# Altium PCB ArduinoUnoShield.PcbDoc
Units mil, origin at the board's own origin, x right, y up, seen from the top; angles counter-clockwise.
Board outline 2700 x 2100 mil, 2 copper layers (Top Layer, Bottom Layer); 41 components, 79 nets, 282 pads, 39 vias.
Unrouted connection lines stored in the file: 2.
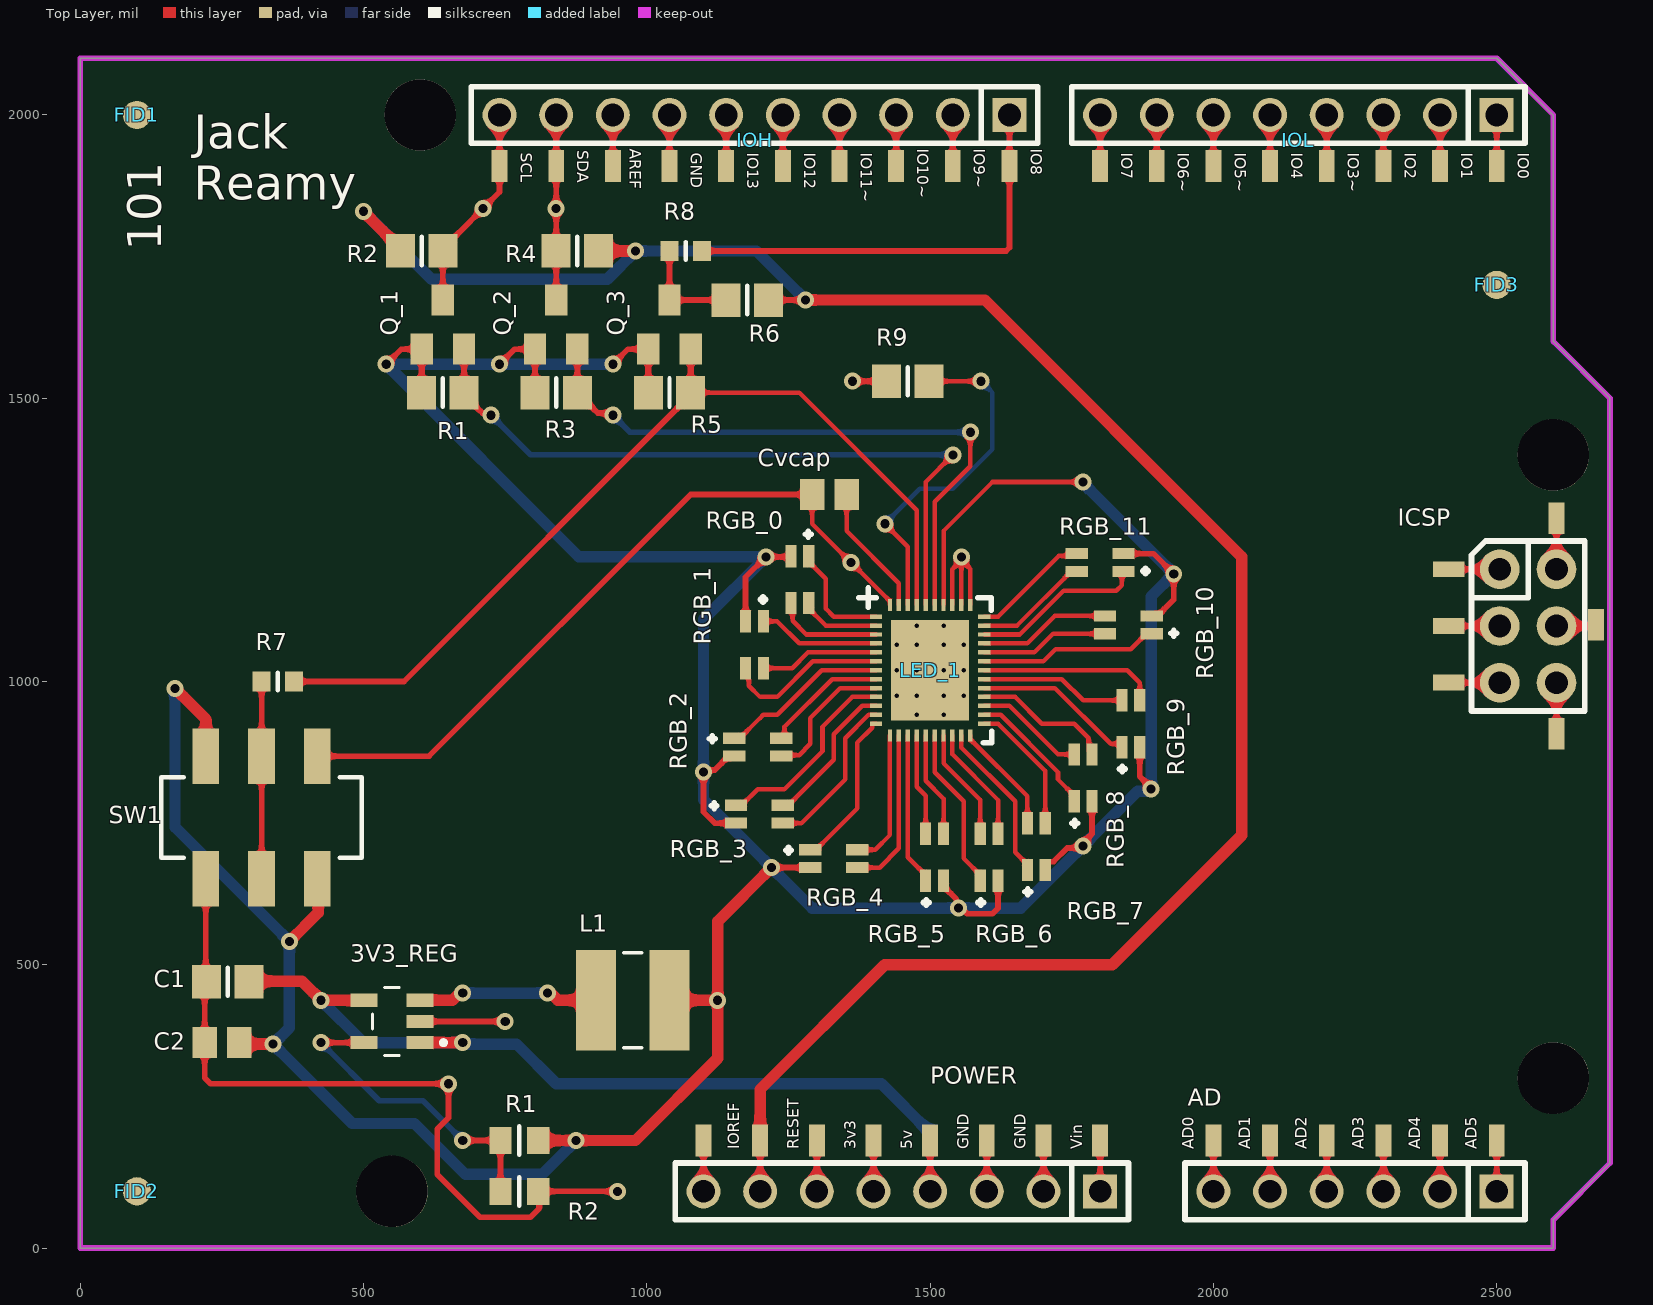
[diagram p0: Top Layer view]
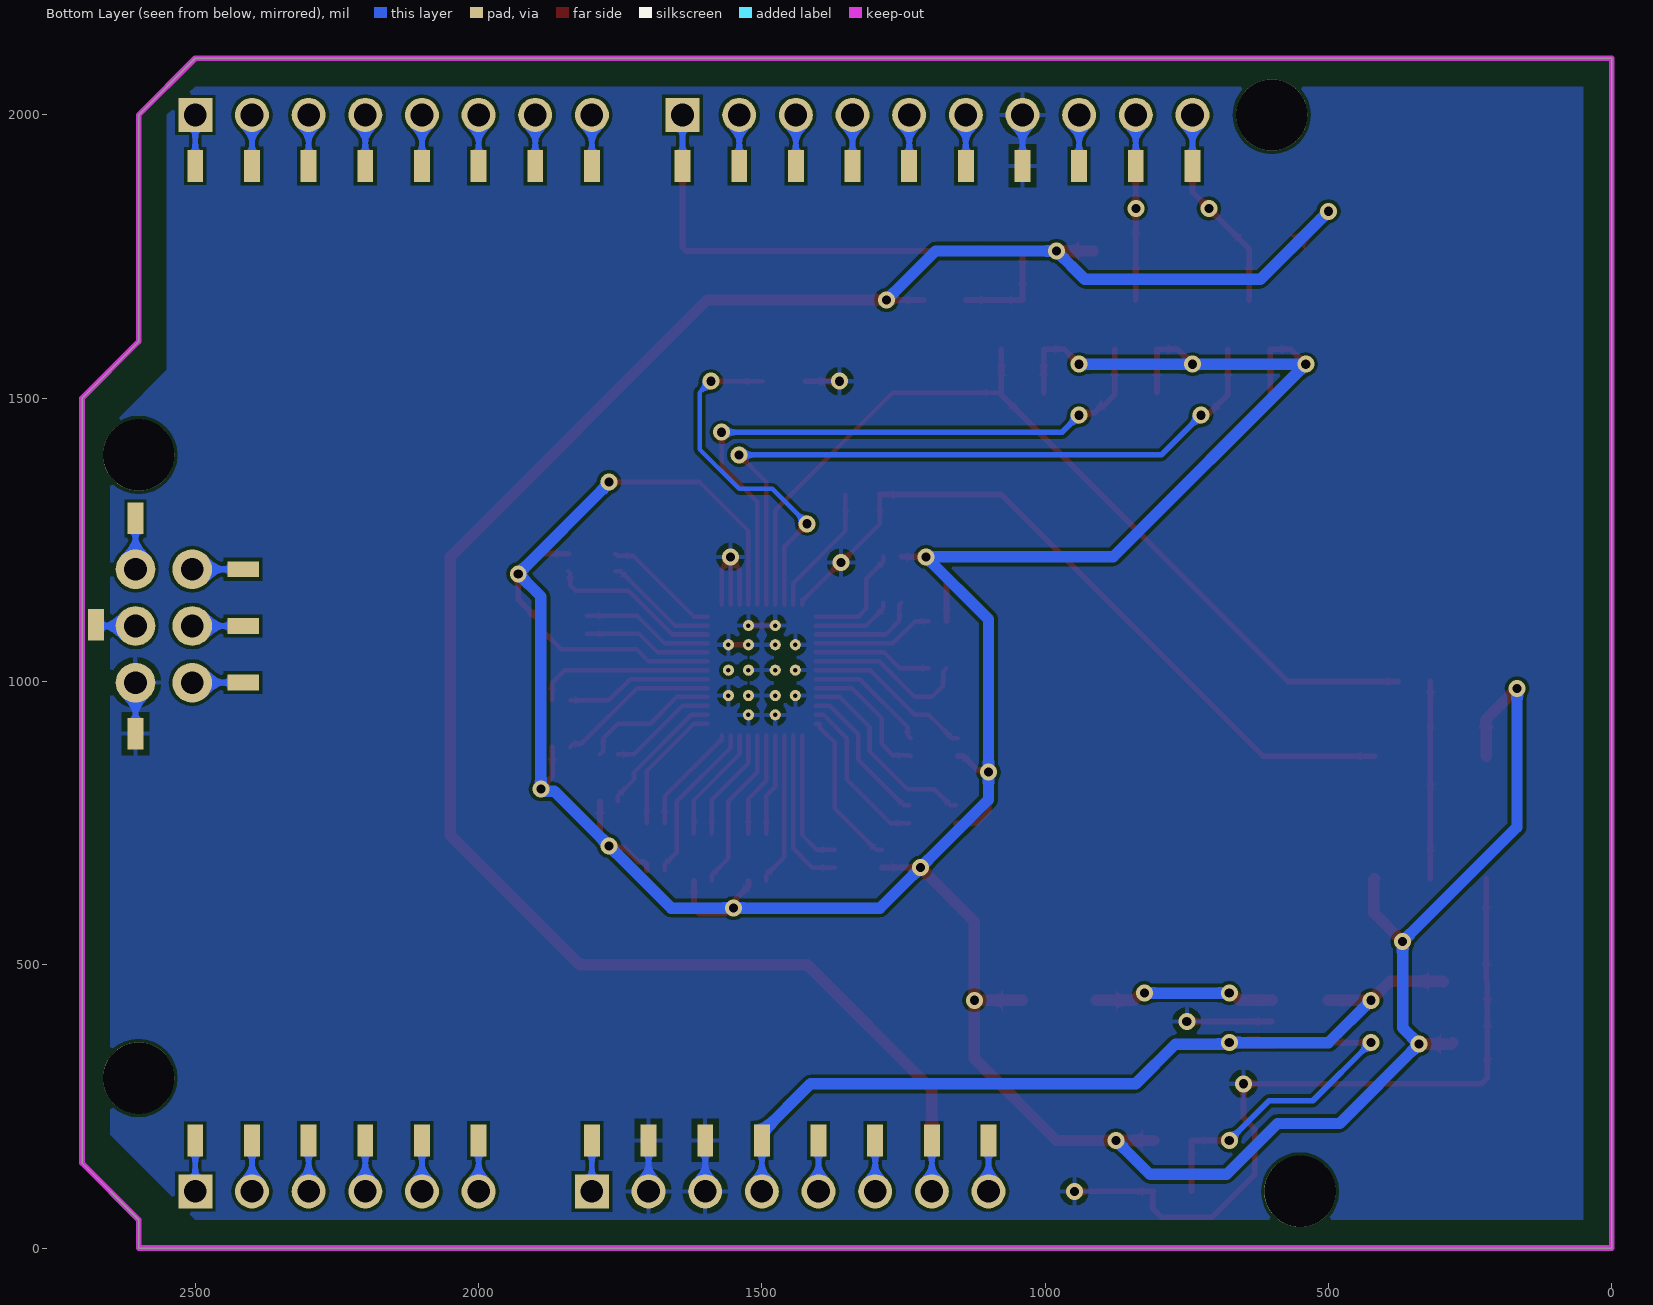
[diagram p1: Bottom Layer view, seen from below]

## Layer stack, top to bottom
Top Solder: solder mask 0.4, Solder Resist, Dk 3.5
Top Layer: signal copper 1.4
Dielectric1: dielectric 12.6, FR-4, Dk 4.8
Bottom Layer: signal copper 1.4
Bottom Solder: solder mask 0.4, Solder Resist, Dk 3.5

## Board outline
0,0 0,2100 2500,2100 2600,2000 2600,1600 2700,1500 2700,150 2600,50 2600,0

## Design rules (kind name [scope] priority, off if disabled: settings)
Clearance "Clearance~Sunstone Circuits" [All] p1: gap=6 ignorepadtopadclearanceinfootprint=FALSE except(0: Arc-Hole Track-Hole SMDPad-Hole THPad-Hole Via-Hole Fill-Hole Poly-Hole Region-Hole Text-Hole) // Sunstone Circuits Minimum Clearance Rule (Double Sided)
HoleSize "HoleSize~Sunstone Circuits" [All] p1: absolutevalues=TRUE maxlimit=251 minlimit=8 maxpercent=80.000 minpercent=20.000 // SSC Hole Size Rule For Single Sided & Double Sided Designs.
HoleSize Testpoint [All] p2: absolutevalues=TRUE maxlimit=100 minlimit=1 maxpercent=80.000 minpercent=20.000
HoleSize TestPointUsage [All] p3: absolutevalues=TRUE maxlimit=100 minlimit=1 maxpercent=80.000 minpercent=20.000
MinimumAnnularRing "MinimumAnnularRing~Sunstone Circuits" [All] p1: minimumring=7 // Sunstone Circuits Minimum Annular Ring (Double Sided)
MinimumSolderMaskSliver [All] p1: minsoldermaskwidth=1
PlaneClearance "PlaneClearance~Sunstone Circuits" [All] p1: clearance=12 // Sunstone Circuits Power Plane Clearance Rule (Double Sided)
PlaneConnect "PlaneConnect~Sunstone Circuits" [All] p1: planeconnectstyle=Relief reliefexpansion=10 reliefentries=4 reliefconductorwidth=8 reliefairgap=10 // Sunstone Circuits Power Plane Connect Rule (Double Sided)
PolygonConnect "PolygonConnect~Sunstone Circuits" [All] p1: connectstyle=Relief reliefconductorwidth=8 reliefentries=4 polygonreliefangle="90 Angle" airgapwidth=10 // Sunstone Circuits Polygon Connect Style (Double Sided)
RoutingVias "RoutingVias~Sunstone Circuits" [All] p1: holewidth=16 width=30 viastyle="Through Hole" minholewidth=16 minwidth=30 maxholewidth=20 maxwidth=40 // Sunstone Circuits Routing Vias Rule (Double Sided)
ShortCircuit "ShortCircuit~Sunstone Circuits" [All] p1: allowed=FALSE // Sunstone Circuits Short Circuit Rule~Do Not Allow (Double Sided)
SilkToSilkClearance [All] p1: silktosilkclearance=1
SilkToSolderMaskClearance [IsPad] p1: minsilkscreentomaskgap=5 clearancetoexposedcopper=TRUE
SolderMaskExpansion "SolderMaskExpansion~Sunstone Circuits" [All] p1: expansion=3 // Sunstone Circuits Solder Mask Expansion Rule (Double Sided)
ViasUnderSMD "ViasUnderSMD~Sunstone Circuits" [All] p1: allowed=FALSE // Sunstone Circuits Vias Under SMD~Do Not Allow (Double Sided)
Width "Width~Sunstone Circuits" [All] p1: maxlimit=100 minlimit=6 preferedwidth=10 // Sunstone Circuits Minimum Width Rule (Double Sided)
23 further rules are at their usual default settings.

## Classes and differential pairs
component class ArduinoUnoShield: 3V3_REG AD C1 C2 Cvcap FID1 FID2 FID3 ICSP L1 LED_1 POWER Q_1 Q_2 Q_3 R1 R2 R3 R4 R5 R6 R7 R8 R9 RGB_0 RGB_1 RGB_2 RGB_3 RGB_4 RGB_5 RGB_6 RGB_7 RGB_8 RGB_9 RGB_10 RGB_11 SW1

## Components (designator, comment, footprint, x,y, rotation, side; value= is the part's Value field where it differs from the comment)
3V3_REG "TLV62568DBVR" *SOT95P280X145-5N 550,400 r90 top
AD "AD" "Header 6x1 8.5mm" 2500,100 r180 top
C1 "4.7uF, 10%" 0805 260,470 r0 top
C2 "1uF, 5%" 0805_CAP_HD 250,362.6 r0 top
Cvcap "22uF, 20%" 0805_CAP_HD 1322.09,1330 r180 top
FID1 "FIDUCIAL" "FIDUCIAL (50MIL ROUND)" 100,2000 r90 top
FID2 "FIDUCIAL" "FIDUCIAL (50MIL ROUND)" 100,100 r90 top
FID3 "FIDUCIAL" "FIDUCIAL (50MIL ROUND)" 2500,1700 r90 top
ICSP "ICSP" ICSP 2505.51,1198.03 r0 top
IOH "IOH" "Header 10x1 8.5mm" 1640,2000 r180 top
IOL "IOL" "Header 8x1 8.5mm" 2500,2000 r180 top
L1 "SDR0403-2R2ML" *SDR0403 975,437.4 r0 top
LED_1 "LP5036RJVR" RJV0046A 1500,1020 r0 top
POWER "POWER_UNO" "Header 8x1 8.5mm v2" 1800,100 r180 top
Q_1 "BSS138" *BSS138_BSS138(Primary) 640,1630 r0 top
Q_2 "BSS138" *BSS138_BSS138(Primary) 840,1630 r0 top
Q_3 "BSS138" *BSS138_BSS138(Primary) 1040,1630 r0 top
R1 "4.7K, 5%" 0805 640,1510 r180 top
R1 "R-NP" 0805_RES_HD 775,190 r0 top (schematic designator "R1 (Rfdt)")
R2 "4.7K, 5%" 0805 602.6,1760 r180 top
R2 "R-NP" 0805_RES_HD 775,100 r0 top (schematic designator "R2 (Rfbb)")
R3 "4.7K, 5%" 0805 840,1510 r180 top
R4 "4.7K, 5%" 0805 877.4,1760 r0 top
R5 "4.7K, 5%" 0805 1040,1510 r180 top
R6 "4.7K, 5%" 0805 1177.4,1673.31 r0 top
R7 "0, 5%" 0603_RES_HD 348.54,1000 r0 top
R8 "0, 5%" 0603_RES_HD 1068.54,1760 r180 top
R9 "4.7K, 5%" 0805 1460.63,1530 r0 top
RGB_0 "RGB LED" PCBComponent_1 1270,1180 r270 top
RGB_1 "RGB LED" PCBComponent_1 1190,1064.88 r270 top
RGB_2 "RGB LED" PCBComponent_1 1195.67,884.17 r0 top
RGB_3 "RGB LED" PCBComponent_1 1198.66,765.75 r0 top
RGB_4 "RGB LED" PCBComponent_1 1330,687.32 r0 top
RGB_5 "RGB LED" PCBComponent_1 1507.87,689.82 r90 top
RGB_6 "RGB LED" PCBComponent_1 1604.15,689.82 r90 top
RGB_7 "RGB LED" PCBComponent_1 1687.5,708.66 r90 top
RGB_8 "RGB LED" PCBComponent_1 1770,830 r90 top
RGB_9 "RGB LED" PCBComponent_1 1854.32,925.51 r90 top
RGB_10 "RGB LED" PCBComponent_1 1850,1100 r180 top
RGB_11 "RGB LED" PCBComponent_1 1800,1210 r180 top
SW1 "JS202011SCQN" JS202011SCQN 320,760 r0 top

## Footprints (in the part's own frame and the unit in brackets; to place one, negate y for a bottom-side part, rotate by r counter-clockwise, add the part's x,y. Pads: shape width x height; smd on the part's side, far side on the other; paste and mask are expansions set on the pad)
0603_RES_HD [mm] "Chip Resistor, 2-Leads, Body 1.60x0.85mm, IPC High Density"
  rect 0.8x0.9 smd: 1(-0.725,0) 2(0.725,0)
  silkscreen extent 0,-0.4 0,0.4, body extent -0.87,-0.48 0.87,0.48, height 0.55
0805 [mm] "Chip Capacitor; Body 2.0 x 1.2 mm (LxW typ)"
  rect 1.3x1.5 smd: 1(-0.95,0) 2(0.95,0)
  silkscreen extent 0,-0.64 0,0.64, body extent -1,-0.6 1,0.6, height 1.5
0805_CAP_HD [mm] "Chip Capacitor, 2-Leads, Body 2.00x1.25mm, IPC High Density"
  rect 1.1x1.4 smd: 1(-0.775,0) 2(0.775,0)
  body extent -1.1,-0.72 1.1,0.73, height 1.4
0805_RES_HD [mm] "Chip Resistor, 2-Leads, Body 2.00x1.25mm, IPC High Density"
  rect 1x1.2 smd: 1(-0.85,0) 2(0.85,0)
  silkscreen extent 0,-0.64 0,0.64, body extent -1.1,-0.68 1.1,0.67, height 0.65
*BSS138_BSS138(Primary) [mm]
  rect 1x1.4 smd: D(0,1.1) G(-0.95,-1.1) S(0.95,-1.1)
*SDR0403 [mil]
  rect 71x177 smd: 1(-65,0) 2(65,0)
  silkscreen extent -16,-84 16,84
*SOT95P280X145-5N [mm]
  rect 0.59x1.21 smd: 1(-0.95,-1.255) 2(0,-1.255) 3(0.95,-1.255) 4(0.95,1.255) 5(-0.95,1.255)
  silkscreen extent -1.53,-2.41 1.53,0.87
"FIDUCIAL (50MIL ROUND)" [mil]
  round 50 smd paste-50 mask+25: FIDDLEYDOODLEYDOO(0,0)
"Header 6x1 8.5mm" [mil] "Stackable 6 pin header"
  rect 60x60 hole 40: 1(0,0)
  rect 28x56 smd: 1(0,-90) 2(100,-90) 3(200,-90) 4(300,-90) 5(400,-90) 6(500,-90)
  rect 28x56 smd far side: 1(0,-90) 2(100,-90) 3(200,-90) 4(300,-90) 5(400,-90) 6(500,-90)
  round 60 hole 40: 2(100,0) 3(200,0) 4(300,0) 5(400,0) 6(500,0)
  silkscreen extent -50,-50 550,50, body extent -50,-50 550,50, height 335
"Header 8x1 8.5mm" [mil] "Stackable 8 pin header"
  rect 28x56 smd: 1(0,90) 2(100,90) 3(200,90) 4(300,90) 5(400,90) 6(500,90) 7(600,90) 8(700,90)
  rect 28x56 smd far side: 1(0,90) 2(100,90) 3(200,90) 4(300,90) 5(400,90) 6(500,90) 7(600,90) 8(700,90)
  rect 60x60 hole 40: 1(0,0)
  round 60 hole 40: 2(100,0) 3(200,0) 4(300,0) 5(400,0) 6(500,0) 7(600,0) 8(700,0)
  silkscreen extent -50,-50 750,50, body extent -50,-50 750,50, height 335
"Header 8x1 8.5mm v2" [mil] "Stackable 8 pin header"
  rect 60x60 hole 40: 1(0,0)
  rect 28x56 smd: 1(0,-90) 2(100,-90) 3(200,-90) 4(300,-90) 5(400,-90) 6(500,-90) 7(600,-90) 8(700,-90)
  rect 28x56 smd far side: 1(0,-90) 2(100,-90) 3(200,-90) 4(300,-90) 5(400,-90) 6(500,-90) 7(600,-90) 8(700,-90)
  round 60 hole 40: 2(100,0) 3(200,0) 4(300,0) 5(400,0) 6(500,0) 7(600,0) 8(700,0)
  silkscreen extent -50,-50 750,50, body extent -50,-50 750,50, height 335
"Header 10x1 8.5mm" [mil] "Stackable 10 pin header"
  rect 28x56 smd: 1(0,90) 2(100,90) 3(200,90) 4(300,90) 5(400,90) 6(500,90) 7(600,90) 8(700,90) 9(800,90) 10(900,90)
  rect 28x56 smd far side: 1(0,90) 2(100,90) 3(200,90) 4(300,90) 5(400,90) 6(500,90) 7(600,90) 8(700,90) 9(800,90) 10(900,90)
  rect 60x60 hole 40: 1(0,0)
  round 60 hole 40: 2(100,0) 3(200,0) 4(300,0) 5(400,0) 6(500,0) 7(600,0) 8(700,0) 9(800,0) 10(900,0)
  silkscreen extent -50,-50 950,50, body extent -50,-50 950,50, height 335
ICSP [mil]
  rect 56x28 smd: 1(-90,0) 3(-90,-100) 5(-90,-200)
  rect 56x28 smd far side: 1(-90,0) 3(-90,-100) 5(-90,-200)
  round 70 hole 40: 1(0,0) 2(100,0) 3(0,-100) 4(100,-100) 5(0,-200) 6(100,-200)
  rect 28x56 smd: 2(100,90) 4(169.49,-98.03) 6(100,-290)
  rect 28x56 smd far side: 2(100,90) 4(169.49,-98.03) 6(100,-290)
  silkscreen extent -50,-250 150,50, body extent -50,-250 150,50, height 485
JS202011SCQN [mm]
  rect 1.2x2.5 smd: 1(-2.5,-2.75) 2(0,-2.75) 3(2.5,-2.75) 4(2.5,2.75) 5(0,2.75) 6(-2.5,2.75)
  silkscreen extent -4.5,-1.8 4.5,1.8, body extent -4.5,-1.8 4.5,1.8, height 5.5
PCBComponent_1 [mm]
  rect 1x0.5 smd: 1(-1.05,0.4) 2(1.05,0.4) 3(-1.05,-0.4) 4(1.05,-0.4)
  silkscreen extent -2.16,0.25 -1.91,0.51
RJV0046A [mm]
  rect 0.55x0.2 smd: 1(-2.425,2.4) 2(-2.425,2) 3(-2.425,1.6) 4(-2.425,1.2) 5(-2.425,0.8) 6(-2.425,0.4) 7(-2.425,0) 8(-2.425,-0.4) 9(-2.425,-0.8) 10(-2.425,-1.2) 11(-2.425,-1.6) 12(-2.425,-2) 13(-2.425,-2.4) 24(2.425,-2.4) 25(2.425,-2) 26(2.425,-1.6) 27(2.425,-1.2) 28(2.425,-0.8) 29(2.425,-0.4) 30(2.425,0) 31(2.425,0.4) 32(2.425,0.8) 33(2.425,1.2) 34(2.425,1.6) 35(2.425,2) 36(2.425,2.4)
  rect 0.2x0.55 smd: 14(-1.8,-2.925) 15(-1.4,-2.925) 16(-1,-2.925) 17(-0.6,-2.925) 18(-0.2,-2.925) 19(0.2,-2.925) 20(0.6,-2.925) 21(1,-2.925) 22(1.4,-2.925) 23(1.8,-2.925) 37(1.8,2.925) 38(1.4,2.925) 39(1,2.925) 40(0.6,2.925) 41(0.2,2.925) 42(-0.2,2.925) 43(-0.6,2.925) 44(-1,2.925) 45(-1.4,2.925) 46(-1.8,2.925)
  rect 3.5x4.5 smd: 47(0,0)
  round 0.5 hole 0.203 mask-25.4: 48(-0.6,2) 49(0.6,2) 50(-0.6,-2) 51(0.6,-2) 52(-1.5,1.14) 53(-0.6,1.14) 54(0.6,1.14) 55(1.5,1.14) 56(-1.5,-1.14) 57(-0.6,-1.14) 58(0.6,-1.14) 59(1.5,-1.14) 60(1.5,0) 61(0.6,0) 62(-0.6,0) 63(-1.5,0)

## Part data
AD: Supplier Part Number 1=52553843, Supplier 1=Arrow, Supplier 2=Arrow, Supplier 3=Digi-Key, Supplier 4=Newark, Supplier Part Number 2=2699089, Supplier Part Number 3=SAM1198-06-ND, Supplier Part Number 4=11P8269
C1: library part CL21A475KPFNNNE, "4.7uF, 10%, 10V", Manufacturer 1=Samsung, Supplier Part Number 1=1276-1259-1-ND, GFUPartNo=CL21A475KPFNNNE, Manufacturer Part Number 1=CL21A475KPFNNNE, PackageReference=0805, Part Type=SMT, Supplier 1=Digi-Key
C2: library part 08056D226MAT2A, "1uF, 5%, 6.3V", Manufacturer 1=AVX, Supplier Part Number 1=478-3647-1-ND, GFUPartNo=08056D226MAT2A, Manufacturer Part Number 1=08056D226MAT2A, PackageReference=0805, Part Type=SMT, Supplier 1=Digi-Key
Cvcap: library part 08056D226MAT2A, "22uF, 20%, 6.3V", Manufacturer 1=AVX, Supplier Part Number 1=478-3647-1-ND, GFUPartNo=08056D226MAT2A, Manufacturer Part Number 1=08056D226MAT2A, PackageReference=0805, Part Type=SMT, Supplier 1=Digi-Key
FID1 FID2 FID3: library part "FIDUCIAL (50MIL ROUND)", "FIDUCIAL (50MIL ROUND)", GFUPartNo="FIDUCIAL (50MIL ROUND)"
ICSP: Supplier Part Number 1=SAM1185-03-ND, Supplier 1=Digi-Key, Supplier 2=Arrow, Supplier 3=Arrow, Supplier Part Number 2=2699340, Supplier Part Number 3=46091550
IOH: Supplier Part Number 1=2698789, Supplier 1=Arrow, Supplier 2=Arrow, Supplier 3=Digi-Key, Supplier Part Number 2=2698803S4475693N1004, Supplier Part Number 3=SAM1198-10-ND
IOL POWER: Supplier Part Number 1=2698925, Supplier 1=Arrow
  IOL: Supplier 2=Arrow, Supplier 3=Digi-Key, Supplier Part Number 2=2698940, Supplier Part Number 3=SAM1198-08-ND
  POWER: Supplier 2=Digi-Key, Supplier 3=Arrow, Supplier Part Number 2=SAM1198-08-ND, Supplier Part Number 3=2698940
L1: "2.2µH Unshielded Wirewound Inductor 2.6A 47mOhm Max Nonstandard", Package="Nonstandard Bourns", Availability=Unavailable, digikey_Link=https://www.digikey.com/product-detail/en/bourns-inc/SDR0403-2R2ML/SDR0403-2R2MLCT-ND/2127089, MF=Bourns, MP=SDR0403-2R2ML, Price=None
LED_1: Manufacturer="Texas Instruments", PartNumber=LP5036RJVR
Q_1 Q_2 Q_3: "N-Channel 50V 220mA _Ta_ 360mW _Ta_ Surface Mount Die", Package="SOT-23 Fairchild Semiconductor", Availability=Unavailable, MF="MICROSS/On Semiconductor", MP=BSS138, Price=None, SnapEDA_Link=https://www.snapeda.com/parts/BSS138/MICROSS/On%20Semiconductor/view-part/215/?ref=snap
R1 R2 R3 R4 R5 R6 R9: library part RMCF0805JT4K70, "RES 4.7K OHM 1/8W 5% 0805 SMD", Manufacturer 1=Stackpole, Supplier Part Number 1=RMCF0805JT4K70CT-ND, GFUPartNo=RMCF0805JT4K70, Manufacturer Part Number 1=RMCF0805JT4K70, Part Type=SMT, Supplier 1=Digi-Key
R1 R2: library part "R-NP 0805", "NO PLACE RESISTOR", GFUPartNo="R-NP 0805"
R7 R8: library part CRCW06030000Z0EA, "RES 0.0 OHM 1/10W 5% 0603 SMD", Manufacturer 1=Vishay, Supplier Part Number 1=541-0.0GCT-ND, GFUPartNo=CRCW06030000Z0EA, Manufacturer Part Number 1=CRCW06030000Z0EA, Part Type=SMT, Supplier 1=Digi-Key
SW1: "SWITCH SLIDE DPDT 6VDC 0.3A SMT", Manufacturer 1="C&K Components", Supplier Part Number 1=401-2002-1-ND, GFUPartNo=JS202011SCQN, Manufacturer Part Number 1=JS202011SCQN, Part Type=SMT, Supplier 1=Digi-Key

## Free pads (board coordinates)
  round 125.98 hole 125.98: 0(550,100) 0(600,2000) 0(2600,300) 0(2600,1400)

## Via types
v1: diameter 30, hole 16, Top Layer to Bottom Layer, 39 vias

## Nets (pads, with @x,y where several pads share a name; then routed paths per layer and width w, separated by ;. In a path a pad name is that pad's centre, name@x,y a point inside that pad or via, vN(x,y) a via of type N, cw(c..) or ccw(c..) an arc to the next point about the centre after c; other vN are vias at no path point)
3V3: POWER.5 | length 180
  Top Layer w10: POWER.5@1400,100 POWER.5@1400,190
  Bottom Layer w10: POWER.5@1400,100 POWER.5@1400,190
3V3S: C2.2 L1.2 LED_1.40 Q_1.G Q_2.G Q_3.G R1.2 R3.2 R5.2 RGB_0.3 RGB_1.3 RGB_2.3 RGB_3.3 RGB_4.3 RGB_5.3 RGB_6.3 RGB_7.3 RGB_8.3 RGB_9.3 RGB_10.3 RGB_11.3 SW1.3 SW1.6 | length 7768.3
  Top Layer w8: LED_1.40 1523.62,1265.75 1610,1352.13 v1(1770,1352.13)
  Top Layer w10: v1(540,1560) 566.69,1586.69 Q_1.G R1.2@602.6,1510 ; v1(740,1560) 766.69,1586.69 Q_2.G R3.2 ; v1(940,1560) 966.69,1586.69 Q_3.G R5.2 ; RGB_2.3 1144.49,868.43 1119.89,843.83 1103.83,843.83 v1(1100,840) 1100,769.89 1119.89,750 RGB_3.3 ; RGB_1.3 1174.25,1184.25 v1(1210,1220) 1252.91,1220 RGB_0.3 ; v1(1220,671.57) RGB_4.3 ; RGB_5.3 1523.62,638.64 1546.17,616.09 1546.17,603.83 v1(1550,600) 1555.41,600 1565.41,590 1610,590 1619.9,599.9 RGB_6.3 ; RGB_7.3 1703.24,677.17 1708.09,682.01 1717.93,682.01 1742.09,706.17 1766.17,706.17 v1(1770,710) 1770,715.41 1785.75,731.16 RGB_8.3 ; RGB_11.3 1894.25,1225.75 v1(1930,1190) 1930,1144.57 1901.18,1115.75 RGB_10.3 ; RGB_9.3 1870.07,832.5 1890,812.57 v1(1890,810)
  Top Layer w20: v1(167,988) 221.57,933.43 SW1.6 ; C2.2 283.11,360 v1(340,360) ; v1(369,541) 420,592 420,650.16 SW1.3 ; R1.2@808.46,190 v1(875,190) 980,190 1125,335 v1(1125,437.4) ; L1.2 v1(1125,437.4) ; v1(1220,671.57) 1125,576.57 v1(1125,437.4)
  Bottom Layer w20: v1(167,988) 167,743 v1(369,541) 369,389 v1(340,360) 480,220 590,220 680,130 815,130 v1(875,190) ; v1(940,1560) v1(740,1560) v1(540,1560) 880,1220 v1(1210,1220) 1100,1110 v1(1100,840) 1100,791.57 v1(1220,671.57) 1291.57,600 v1(1550,600) 1660,600 v1(1770,710) 1866.17,806.17 1886.17,806.17 v1(1890,810) 1890,1150 v1(1930,1190) v1@1768.94,1351.06
5V: 3V3_REG.1 3V3_REG.4 C1.2 ICSP.2 POWER.4 | length 1852.8
  Top Layer w10: POWER.4@1500,100 1500,190 POWER.4@1500,204 ; ICSP.2@2605.51,1198.03 ICSP.2@2605.51,1288.03
  Top Layer w20: C1.2 298.43,471.02 391.38,471.02 v1(425,437.4) 3V3_REG.4 ; 3V3_REG.1 v1(675,362.6)
  Bottom Layer w10: POWER.4@1500,100 POWER.4@1500,190 ; ICSP.2@2605.51,1198.03 ICSP.2@2605.51,1288.03
  Bottom Layer w20: v1(425,437.4) 499.8,362.6 v1(675,362.6) 677.6,360 770,360 840,290 1414,290 1500,204 POWER.4@1500,190
AD0: AD.6 | length 180
  Top Layer w10: AD.6@2000,100 AD.6@2000,190
  Bottom Layer w10: AD.6@2000,100 AD.6@2000,190
AD1: AD.5 | length 180
  Top Layer w10: AD.5@2100,100 AD.5@2100,190
  Bottom Layer w10: AD.5@2100,100 AD.5@2100,190
AD2: AD.4 | length 180
  Top Layer w10: AD.4@2200,100 AD.4@2200,190
  Bottom Layer w10: AD.4@2200,100 AD.4@2200,190
AD3: AD.3 | length 180
  Top Layer w10: AD.3@2300,100 AD.3@2300,190
  Bottom Layer w10: AD.3@2300,100 AD.3@2300,190
AD4: AD.2 | length 180
  Top Layer w10: AD.2@2400,100 AD.2@2400,190
  Bottom Layer w10: AD.2@2400,100 AD.2@2400,190
AD5: AD.1 | length 180
  Top Layer w10: AD.1@2500,100 AD.1@2500,190
  Bottom Layer w10: AD.1@2500,100 AD.1@2500,190
AREF: IOH.8 | length 180
  Top Layer w10: IOH.8@940,1910 IOH.8@940,2000
  Bottom Layer w10: IOH.8@940,1910 IOH.8@940,2000
EN_S: LED_1.43 Q_3.S R5.1 R7.2 | length 1642.7
  Top Layer w8: R5.1 1268.69,1510 1476.38,1302.32 LED_1.43
  Top Layer w10: R7.2 571.34,1000 1077.4,1506.06 R5.1 Q_3.S
GND: 3V3_REG.2 C1.1 C2.1 Cvcap.2 ICSP.6 IOH.7 LED_1.37 LED_1.38 LED_1.39 LED_1.46 LED_1.47 LED_1.48 LED_1.49 LED_1.50 LED_1.51 LED_1.52 LED_1.53 LED_1.54 LED_1.55 LED_1.56 LED_1.57 LED_1.58 LED_1.59 LED_1.60 LED_1.61 LED_1.62 LED_1.63 POWER.2 POWER.3 R2.2@808.46,100 R9.1 SW1.1 SW1.4 | length 3935.9
  Top Layer w8: Cvcap.2 1291.57,1278.43 v1(1360,1210) 1361.06,1210 1429.13,1141.92 LED_1.46 ; LED_1.39 1539.37,1198 v1@1555.18,1213.82 ; LED_1.38 1555.18,1135.22 v1@1555.18,1213.82 ; LED_1.37 1570.87,1198.59 1555.41,1214.05 v1(1555.41,1220) 1555.18,1219.77 v1@1555.18,1213.82
  Top Layer w10: SW1.1 221.57,471.02 219.49,468.94 C2.1 219.49,300.51 230,290 v1(650,290) 650,230 630,210 630,130 705.86,54.14 794.14,54.14 810,70 810,98.46 808.46,100 v1(948.46,100) ; SW1.4 615.67,868.27 1077.4,1330 Cvcap.2 ; 3V3_REG.2 v1(750,400) ; IOH.7@1040,1910 IOH.7@1040,2000 ; v1(1362.76,1530) R9.1 ; LED_1.48 LED_1.49 ; LED_1.54 LED_1.55 ; POWER.3@1600,100 POWER.3@1600,190 ; POWER.2@1700,100 POWER.2@1700,190 ; ICSP.6@2605.51,908.03 ICSP.6@2605.51,998.03
  Bottom Layer w10: IOH.7@1040,1910 IOH.7@1040,2000 ; POWER.3@1600,100 POWER.3@1600,190 ; POWER.2@1700,100 POWER.2@1700,190 ; ICSP.6@2605.51,908.03 ICSP.6@2605.51,998.03
IO0: IOL.1 | length 180
  Top Layer w10: IOL.1@2500,1910 IOL.1@2500,2000
  Bottom Layer w10: IOL.1@2500,1910 IOL.1@2500,2000
IO1: IOL.2 | length 180
  Top Layer w10: IOL.2@2400,1910 IOL.2@2400,2000
  Bottom Layer w10: IOL.2@2400,1910 IOL.2@2400,2000
IO2: IOL.3 | length 180
  Top Layer w10: IOL.3@2300,1910 IOL.3@2300,2000
  Bottom Layer w10: IOL.3@2300,1910 IOL.3@2300,2000
IO3: IOL.4 | length 180
  Top Layer w10: IOL.4@2200,1910 IOL.4@2200,2000
  Bottom Layer w10: IOL.4@2200,1910 IOL.4@2200,2000
IO4: IOL.5 | length 180
  Top Layer w10: IOL.5@2100,1910 IOL.5@2100,2000
  Bottom Layer w10: IOL.5@2100,1910 IOL.5@2100,2000
IO5: IOL.6 | length 180
  Top Layer w10: IOL.6@2000,1910 IOL.6@2000,2000
  Bottom Layer w10: IOL.6@2000,1910 IOL.6@2000,2000
IO6: IOL.7 | length 180
  Top Layer w10: IOL.7@1900,1910 IOL.7@1900,2000
  Bottom Layer w10: IOL.7@1900,1910 IOL.7@1900,2000
IO7: IOL.8 | length 180
  Top Layer w10: IOL.8@1800,1910 IOL.8@1800,2000
  Bottom Layer w10: IOL.8@1800,1910 IOL.8@1800,2000
IO8: IOH.1 R8.1 | length 869.5
  Top Layer w10: R8.1 1634.14,1760 1640,1765.86 1640,1910 IOH.1@1640,2000
  Bottom Layer w10: IOH.1@1640,1910 IOH.1@1640,2000
IO9: IOH.2 | length 180
  Top Layer w10: IOH.2@1540,1910 IOH.2@1540,2000
  Bottom Layer w10: IOH.2@1540,1910 IOH.2@1540,2000
IO10: IOH.3 | length 180
  Top Layer w10: IOH.3@1440,1910 IOH.3@1440,2000
  Bottom Layer w10: IOH.3@1440,1910 IOH.3@1440,2000
IO11: IOH.4 | length 180
  Top Layer w10: IOH.4@1340,1910 IOH.4@1340,2000
  Bottom Layer w10: IOH.4@1340,1910 IOH.4@1340,2000
IO12: IOH.5 | length 180
  Top Layer w10: IOH.5@1240,1910 IOH.5@1240,2000
  Bottom Layer w10: IOH.5@1240,1910 IOH.5@1240,2000
IO13: IOH.6 | length 180
  Top Layer w10: IOH.6@1140,1910 IOH.6@1140,2000
  Bottom Layer w10: IOH.6@1140,1910 IOH.6@1140,2000
IOREF: POWER.7 R2.2@565.2,1760 R4.2 R6.2 | length 3868.7
  Top Layer w10: v1@500,1829.13 v1(500,1830) ; R2.2@565.2,1760 R2.2@565.2,1763.94 ; POWER.7@1200,100 POWER.7@1200,190 ; R6.2 v1(1280,1673.31)
  Top Layer w20: v1@500,1829.13 R2.2@565.2,1763.94 ; R4.2 v1(980,1760) ; POWER.7@1200,190 1200,280 1420,500 1821.36,500 2050,728.64 2050,1220 1596.69,1673.31 v1(1280,1673.31)
  Bottom Layer w10: POWER.7@1200,100 POWER.7@1200,190
  Bottom Layer w20: v1(500,1830) 620,1710 930,1710 v1(980,1760) 1193.31,1760 v1(1280,1673.31)
MISO: ICSP.1 | length 180
  Top Layer w10: ICSP.1@2415.51,1198.03 ICSP.1@2505.51,1198.03
  Bottom Layer w10: ICSP.1@2415.51,1198.03 ICSP.1@2505.51,1198.03
MOSI: ICSP.4 | length 140.6
  Top Layer w10: ICSP.4@2605.51,1098.03 2673.03,1098.03 ICSP.4@2675,1100
  Bottom Layer w10: ICSP.4@2605.51,1098.03 2673.03,1098.03 ICSP.4@2675,1100
Net3V3_REG_3: 3V3_REG.3 L1.1 | length 321
  Top Layer w20: 3V3_REG.3 656.99,437.4 669.59,450 v1(675,450) ; v1(825,450) 830.41,450 843.01,437.4 L1.1
  Bottom Layer w20: v1(675,450) v1(825,450)
Net3V3_REG_5: 3V3_REG.5 R1.1@741.54,190 R2.1@741.54,100 | length 553.6
  Top Layer w10: v1(425,362.6) 3V3_REG.5 ; v1(675,190) 741.54,190 R2.1@741.54,100
  Bottom Layer w10: v1(425,362.6) 527.6,260 605,260 v1(675,190)
NetCvcap_1: Cvcap.1 LED_1.45 | length 233.1
  Top Layer w8: Cvcap.1 1352.6,1265.75 1444.88,1173.46 LED_1.45
NetLED_1_1: LED_1.1 RGB_0.1 | length 199.6
  Top Layer w8: RGB_0.1 1285.75,1211.5 1315.83,1181.42 1315.83,1128.82 1330.16,1114.49 LED_1.1
NetLED_1_2: LED_1.2 RGB_0.2 | length 141.1
  Top Layer w8: RGB_0.2 1285.75,1128.82 1315.83,1098.74 LED_1.2
NetLED_1_3: LED_1.3 RGB_0.4 | length 190.1
  Top Layer w8: RGB_0.4 1257.28,1135.64 1257.28,1106.98 1281.26,1082.99 LED_1.3
NetLED_1_4: LED_1.4 RGB_1.1 | length 214.9
  Top Layer w8: RGB_1.1 1229.72,1106.22 1268.69,1067.24 LED_1.4
NetLED_1_5: LED_1.5 RGB_1.2 | length 210.4
  Top Layer w8: RGB_1.2 1256.49,1023.54 1284.44,1051.5 LED_1.5
NetLED_1_6: LED_1.6 RGB_1.4 | length 292.2
  Top Layer w8: RGB_1.4 1180.09,1017.7 1180.09,992.43 1199.76,972.76 1230,972.76 1292.99,1035.75 LED_1.6
NetLED_1_7: LED_1.7 RGB_2.1 | length 299.9
  Top Layer w8: RGB_2.1 1164.17,899.92 1199.76,935.51 1200,935.51 1205.75,941.26 1230,941.26 1308.74,1020 LED_1.7
NetLED_1_8: LED_1.8 RGB_2.2 | length 219.1
  Top Layer w8: RGB_2.2 1242.82,905.73 1242.82,920 1327.07,1004.25 LED_1.8
NetLED_1_9: LED_1.9 RGB_2.4 | length 243.9
  Top Layer w8: RGB_2.4 1238.61,870.03 1268.69,870.03 1288.66,890 1288.66,935.51 1341.65,988.5 LED_1.9
NetLED_1_10: LED_1.10 RGB_3.1 | length 351.5
  Top Layer w8: RGB_3.1 1167.17,781.5 1195.67,810 1242.82,810 1310,877.18 1310,920 1362.76,972.76 LED_1.10
NetLED_1_11: LED_1.11 RGB_3.2 | length 263.8
  Top Layer w8: RGB_3.2 1249.84,781.5 1330,861.65 1330,907.01 1380,957.01 LED_1.11
NetLED_1_12: LED_1.12 RGB_3.4 | length 286.4
  Top Layer w8: RGB_3.4 1272.91,750 1350,827.09 1350,899.89 1391.31,941.2 1404.46,941.2 LED_1.12
NetLED_1_13: LED_1.13 RGB_4.1 | length 280.2
  Top Layer w8: RGB_4.1 1298.5,703.07 1371.34,775.91 1371.34,892.32 1397.7,918.68 1397.7,925.45 1397.76,925.51 LED_1.13
NetLED_1_14: LED_1.14 RGB_4.2 | length 244.3
  Top Layer w8: RGB_4.2 1403.07,703.07 1429.13,729.13 LED_1.14
NetLED_1_15: LED_1.15 RGB_4.4 | length 286.9
  Top Layer w8: RGB_4.4 1410.89,671.57 1444.88,705.57 LED_1.15
NetLED_1_16: LED_1.16 RGB_5.1 | length 269.4
  Top Layer w8: LED_1.16 1460.63,689.82 1492.13,658.33 RGB_5.1
NetLED_1_17: LED_1.17 RGB_5.2 | length 180.2
  Top Layer w8: LED_1.17 1476.38,814.04 1492.13,798.3 RGB_5.2
NetLED_1_18: LED_1.18 RGB_5.4 | length 186.7
  Top Layer w8: LED_1.18 1492.13,824.84 1523.62,793.34 RGB_5.4
NetLED_1_19: LED_1.19 RGB_6.1 | length 289.7
  Top Layer w8: LED_1.19 1507.87,839.84 1559.06,788.66 1559.06,687.67 1588.4,658.33 RGB_6.1
NetLED_1_20: LED_1.20 RGB_6.2 | length 200.5
  Top Layer w8: LED_1.20 1523.62,855.75 1588.4,790.97 RGB_6.2
NetLED_1_21: LED_1.21 RGB_6.4 | length 207
  Top Layer w8: LED_1.21 1539.37,871.34 1619.9,790.81 RGB_6.4
NetLED_1_22: LED_1.22 RGB_7.1 | length 285.8
  Top Layer w8: LED_1.22 1555.18,904.78 1555.18,883.48 1650,788.66 1650,698.91 1671.75,677.17 RGB_7.1
NetLED_1_23: LED_1.23 RGB_7.2 | length 196.6
  Top Layer w8: LED_1.23 1570.87,898.08 1671.75,797.2 RGB_7.2
NetLED_1_24: LED_1.24 RGB_7.4 | length 234.5
  Top Layer w8: LED_1.24 1619.9,925.51 1703.24,842.17 RGB_7.4
NetLED_1_25: LED_1.25 RGB_8.1 | length 235.3
  Top Layer w8: LED_1.25 1624.41,941.26 1725.67,840 1725.67,827.09 1754.25,798.5 RGB_8.1
NetLED_1_26: LED_1.26 RGB_8.2 | length 194.3
  Top Layer w8: LED_1.26 1640,957.01 1725.67,871.34 RGB_8.2
NetLED_1_27: LED_1.27 RGB_8.4 | length 245.6
  Top Layer w8: LED_1.27 1650,972.76 1697.24,925.51 1754.25,925.51 1779.91,899.86 1779.91,877.18 RGB_8.4
NetLED_1_28: LED_1.28 RGB_9.1 | length 286.3
  Top Layer w8: LED_1.28 1720.02,988.5 1818.52,890 1832.75,890 RGB_9.1
NetLED_1_29: LED_1.29 RGB_9.2 | length 258.6
  Top Layer w8: LED_1.29 1732.6,1004.25 1770,966.85 RGB_9.2
NetLED_1_30: LED_1.30 RGB_9.4 | length 314.9
  Top Layer w8: LED_1.30 1848.1,1020 1870.07,998.03 RGB_9.4
NetLED_1_31: LED_1.31 RGB_10.1 | length 316
  Top Layer w8: LED_1.31 1700,1035.75 1721.33,1057.08 1854.32,1057.08 1881.5,1084.25 RGB_10.1
NetLED_1_32: LED_1.32 RGB_10.2 | length 226.8
  Top Layer w8: LED_1.32 1684.15,1051.5 1716.91,1084.25 RGB_10.2
NetLED_1_33: LED_1.33 RGB_10.4 | length 233.3
  Top Layer w8: LED_1.33 1671.75,1067.24 1720.25,1115.75 RGB_10.4
NetLED_1_34: LED_1.34 RGB_11.1 | length 304.5
  Top Layer w8: LED_1.34 1658.44,1082.99 1735.45,1160 1828.57,1160 1838.57,1170 1838.57,1191.49 RGB_11.1
NetLED_1_35: LED_1.35 RGB_11.2 | length 202.8
  Top Layer w8: LED_1.35 1653.31,1098.74 1748.82,1194.25 RGB_11.2
NetLED_1_36: LED_1.36 RGB_11.4 | length 209.3
  Top Layer w8: LED_1.36 1619.9,1114.49 1726.98,1221.57 1754.48,1221.57 RGB_11.4
NetLED_1_44: LED_1.44 R9.2 | length 624.8
  Top Layer w8: v1(1420,1278.43) 1460.63,1237.8 LED_1.44 ; R9.2 v1(1590,1530)
  Bottom Layer w8: v1(1420,1278.43) 1481.57,1340 1540,1340 1610,1410 1610,1510 v1(1590,1530)
NetQ_3_D: Q_3.D R6.1 R8.2 | length 186.7
  Top Layer w10: R8.2 Q_3.D R6.1
NetR7_1: R7.1 SW1.2 SW1.5 | length 348.3
  Top Layer w10: SW1.2 SW1.5 R7.1
PIN8: POWER.8 | length 180
  Top Layer w10: POWER.8@1100,100 POWER.8@1100,190
  Bottom Layer w10: POWER.8@1100,100 POWER.8@1100,190
RESET: ICSP.5 POWER.6 | length 360
  Top Layer w10: POWER.6@1300,100 POWER.6@1300,190 ; ICSP.5@2415.51,998.03 ICSP.5@2505.51,998.03
  Bottom Layer w10: POWER.6@1300,100 POWER.6@1300,190 ; ICSP.5@2415.51,998.03 ICSP.5@2505.51,998.03
SCK: ICSP.3 | length 180
  Top Layer w10: ICSP.3@2415.51,1098.03 ICSP.3@2505.51,1098.03
  Bottom Layer w10: ICSP.3@2415.51,1098.03 ICSP.3@2505.51,1098.03
SCL: IOH.10 Q_1.D R2.1@640,1760 | length 458.1
  Top Layer w10: Q_1.D 640,1760 640,1763.94 740,1863.94 740,1910 IOH.10@740,2000
  Bottom Layer w10: IOH.10@740,1910 IOH.10@740,2000
  other v1: 711.06,1835
SCL_S: LED_1.42 Q_1.S R1.1@677.4,1510 | length 1271.8
  Top Layer w8: LED_1.42 1492.13,1352.13 v1(1540,1400)
  Top Layer w10: Q_1.S 677.4,1510 677.4,1506.06 709.64,1473.83 721.17,1473.83 v1(725,1470)
  Bottom Layer w10: v1(725,1470) 795,1400 v1(1540,1400)
SDA: IOH.9 Q_2.D R4.1 | length 416.7
  Top Layer w10: Q_2.D R4.1 840,1910 IOH.9@840,2000
  Bottom Layer w10: IOH.9@840,1910 IOH.9@840,2000
  other v1: 840,1835
SDA_S: LED_1.41 Q_2.S R3.1 | length 1133.5
  Top Layer w8: LED_1.41 1507.87,1317.01 1570.87,1380 v1(1570.87,1440) v1@1570.09,1439.22
  Top Layer w10: Q_2.S R3.1 877.4,1506.06 897.99,1485.47 901.93,1485.47 913.57,1473.83 936.17,1473.83 v1(940,1470)
  Bottom Layer w10: v1(940,1470) 970,1440 v1(1570.87,1440)
VIN: POWER.1 | length 180
  Top Layer w10: POWER.1@1800,100 POWER.1@1800,190
  Bottom Layer w10: POWER.1@1800,100 POWER.1@1800,190
pads on no net: FID1.FIDDLEYDOODLEYDOO FID2.FIDDLEYDOODLEYDOO FID3.FIDDLEYDOODLEYDOO

## Polygon pours and split planes (outlines as drawn)
GND on Bottom Layer "Bottom Layer-GND" (solid, remove dead copper, pour order 8): 50,2050 2500,2050 2550,2000 2550,1550 2650,1450 2650,200 2500,50 50,50

## Keep-outs
Keep-Out Layer:
  the board outline again, w10

## Silkscreen, mask and mechanical layers (free items; w line width, h text height)
Top Overlay:
  lines w10: 1374.03,1148.03 1390,1148.03 ; 1390.03,1147.02 1391.02,1148 ; 1390.26,1147.77 1390,1148.03 ; 1390.52,1147.51 1390,1148.03 ; 1391,1148.03 1391,1165 ; 1391.03,1131 1391.03,1147.02 ; 1392,1148 1390.03,1148 1405,1148 ; 1584.15,1148.03 1608,1148.03 ; 1594.15,892 1609,892 ; 1608,1126 1608,1131.16 1608,1148.03 ; 1608,1147.48 1608,1148.03 ; 1609,894.17 1609,892 ; 1609,912 1609,892
  text "AREF" at 970,1940 h20 r270
  text "IO10~" at 1477.42,1940 h20 r270
  text "IO9~" at 1577.42,1940 h20 r270
  text "IO8" at 1677.42,1940 h20 r270
  text "SDA" at 877.42,1937.93 h20 r270
  text "SCL" at 777.42,1932.93 h20 r270
  text "GND" at 1077.42,1932.93 h20 r270
  text "IO13" at 1177.42,1932.93 h20 r270
  text "IO12" at 1277.42,1932.93 h20 r270
  text "IO11~" at 1377.42,1932.93 h20 r270
  text "IO7" at 1837.42,1932.93 h20 r270
  text "IO6~" at 1937.42,1932.93 h20 r270
  text "IO5~" at 2037.42,1932.93 h20 r270
  text "IO4" at 2137.42,1932.93 h20 r270
  text "IO3~" at 2237.42,1932.93 h20 r270
  text "IO2" at 2337.42,1932.93 h20 r270
  text "IO1" at 2437.42,1932.93 h20 r270
  text "IO0" at 2537.42,1932.93 h20 r270
  text "Jack / Reamy" at 200,1850 h60
  text "101" at 142.83,1760 h60 r90
  text "IOREF" at 1163.44,174 h20 r90
  text "RESET" at 1268.44,174 h20 r90
  text "3v3" at 1368.44,174 h20 r90
  text "5v" at 1468.44,174 h20 r90
  text "GND" at 1568.44,174 h20 r90
  text "GND" at 1668.44,174 h20 r90
  text "Vin" at 1768.44,174 h20 r90
  text "AD0" at 1965,174 h20 r90
  text "AD1" at 2065,174 h20 r90
  text "AD2" at 2165,174 h20 r90
  text "AD3" at 2265,174 h20 r90
  text "AD4" at 2365,174 h20 r90
  text "AD5" at 2465,174 h20 r90
Mechanical 1:
  circle w5: c600,2000 r62.99
  circle w5: c2600,300 r62.99
  circle w5: c550,100 r62.99
  circle w5: c2600,1400 r62.99